# EAGLE board sound (EAGLE 7.2.0)
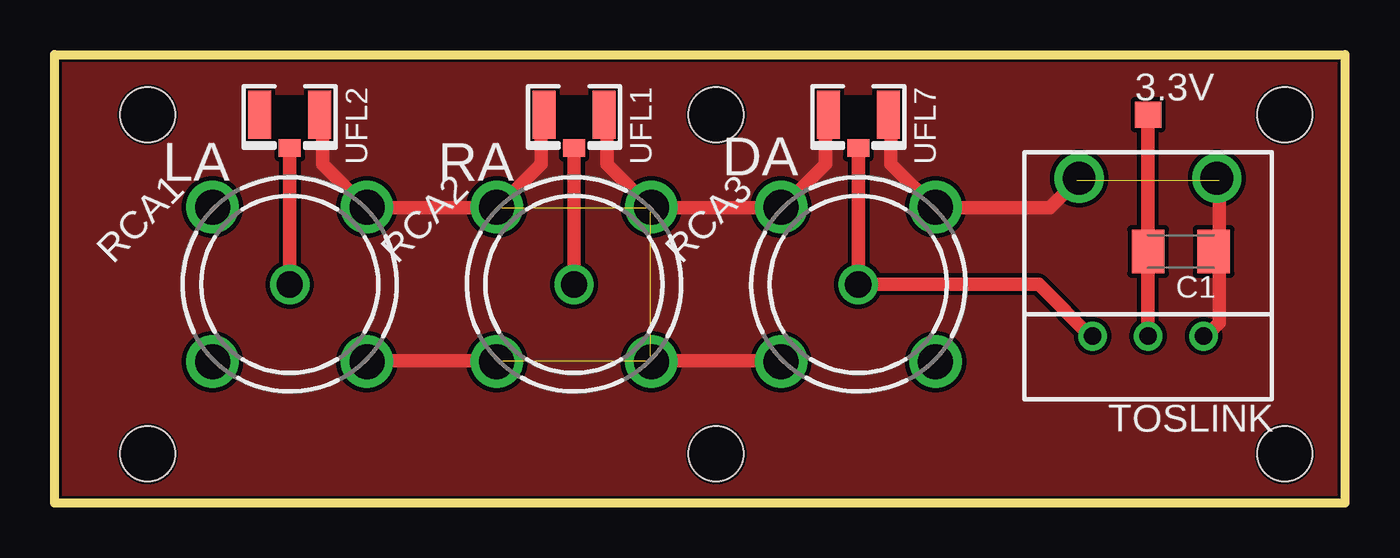
[diagram p0: board, top side]

Size 59 x 20.5 mm. Coordinates in mm from the lower left corner, seen from the top.
Outline: 59,20.5 59,0 0,0 0,20.5 59,20.5
Copper layers (1*16): Top 0.035mm / dielectric 1.5mm / Bottom 0.035mm
Design rules "default *": minimum track width 10mil, minimum drill 24mil, track to track 8mil, track to pad 8mil, pad to pad 8mil, via to via 8mil, smd to smd 8mil, copper to edge 5mil, drill to drill 8mil, minimum pad ring 10mil, minimum via ring 8mil, stop-mask expansion 4mil, vias tented up to drill 0mil, thermal gap 10mil
Holes 2.5 mm at 4.25,17.75 4.25,2.25 30.25,2.25 56.25,17.75 56.25,2.25 30.25,17.75

## Footprints (pad centres in the part's own frame; a part is rotated, then mirrored left to right if it is on the bottom)
TP12SQ = smd 1.2 x 1.2: TP 0,0
C1206K = smd 1.5 x 2: 1 -1.5,0; 2 1.5,0
BTOR1 = drill 1.6 pad 2.2: S -5,0; S@1 0,5; S@2 5,0; S@3 0,-5 | drill 1.2 pad 1.6: T 0,0
PLT133/T9 = drill 0.8 pad 1.27: 1 2.54,7.62; 2 0,7.62; 3 -2.54,7.62 | drill 1.5: P$2 -3.15,0.4; P$3 3.15,0.4
U.FL = smd 2.2 x 1.05: 1 0,1.375; 2 0,-1.375 | smd 0.8 x 1: 3 1.525,0

## Placement (x,y rotation side)
3.3V  [TP12SQ]  50,17.75 0 top
C1  1uf  [C1206K]  51.5,11.5 180 top
RCA1  [BTOR1]  10.75,10 45 top
RCA2  [BTOR1]  23.75,10 45 top
RCA3  [BTOR1]  36.75,10 45 top
TOSLINK  [PLT133/T9]  50,15.25 180 top
UFL1  [U.FL]  23.75,17.75 270 top
UFL2  [U.FL]  10.75,17.75 270 top
UFL7  [U.FL]  36.75,17.75 270 top

## Library data of the parts
3.3V = testpad1
C1 = resistor
RCA1-RCA3 = con-lumberg
TOSLINK = optocoupler1
UFL1 UFL2 UFL7 = adafruit

## Nets
S$1: RCA1.T
S$6: RCA2.T

## Tracks (layer width: path | path; a pad name or v marks a point on that pad's centre or on a via)
GROUND  (4 unrouted)
  Top 0.61: 52.5,7.5 53.25,8.25 53.25,14.75 | 46.75,14.75 45.5,13.5 40.25,13.5 38.25,15.5 38.25,17.5 | 27.25,6.5 33.25,6.5 | 14.25,6.5 20.25,6.5 | 35.25,17.75 35.25,15.5 33.25,13.5 27.25,13.5 25.25,15.5 25.25,17.5 | 22.25,17.75 22.25,15.5 20.25,13.5 14.25,13.5 12.25,15.5 12.25,17.75
  pour Top: 0,20.5 0,0 59,0 59,20.5
S$1
  Top 0.61: 10.75,16.25 RCA1.T
S$6
  Top 0.61: 23.75,16.25 RCA2.T
S$7
  Top 0.61: 36.75,16.25 36.75,10 45,10 47.5,7.5
VCC
  Top 0.61: 50,7.5 50,17.5

## Text on the board
tNames: LA | RA | DA